# Altium PCB mppt.PcbDoc (part 3 of 6)
Units mm, origin at the board's own origin, x right, y up, seen from the top; angles counter-clockwise.
Board outline 161 x 166 mm, 6 copper layers (Top Layer, Layer 1, Layer 2, Layer 3, Layer 4, Bottom Layer), stack 0.815 mm thick; 460 components, 230 nets, 1421 pads, 2551 vias.
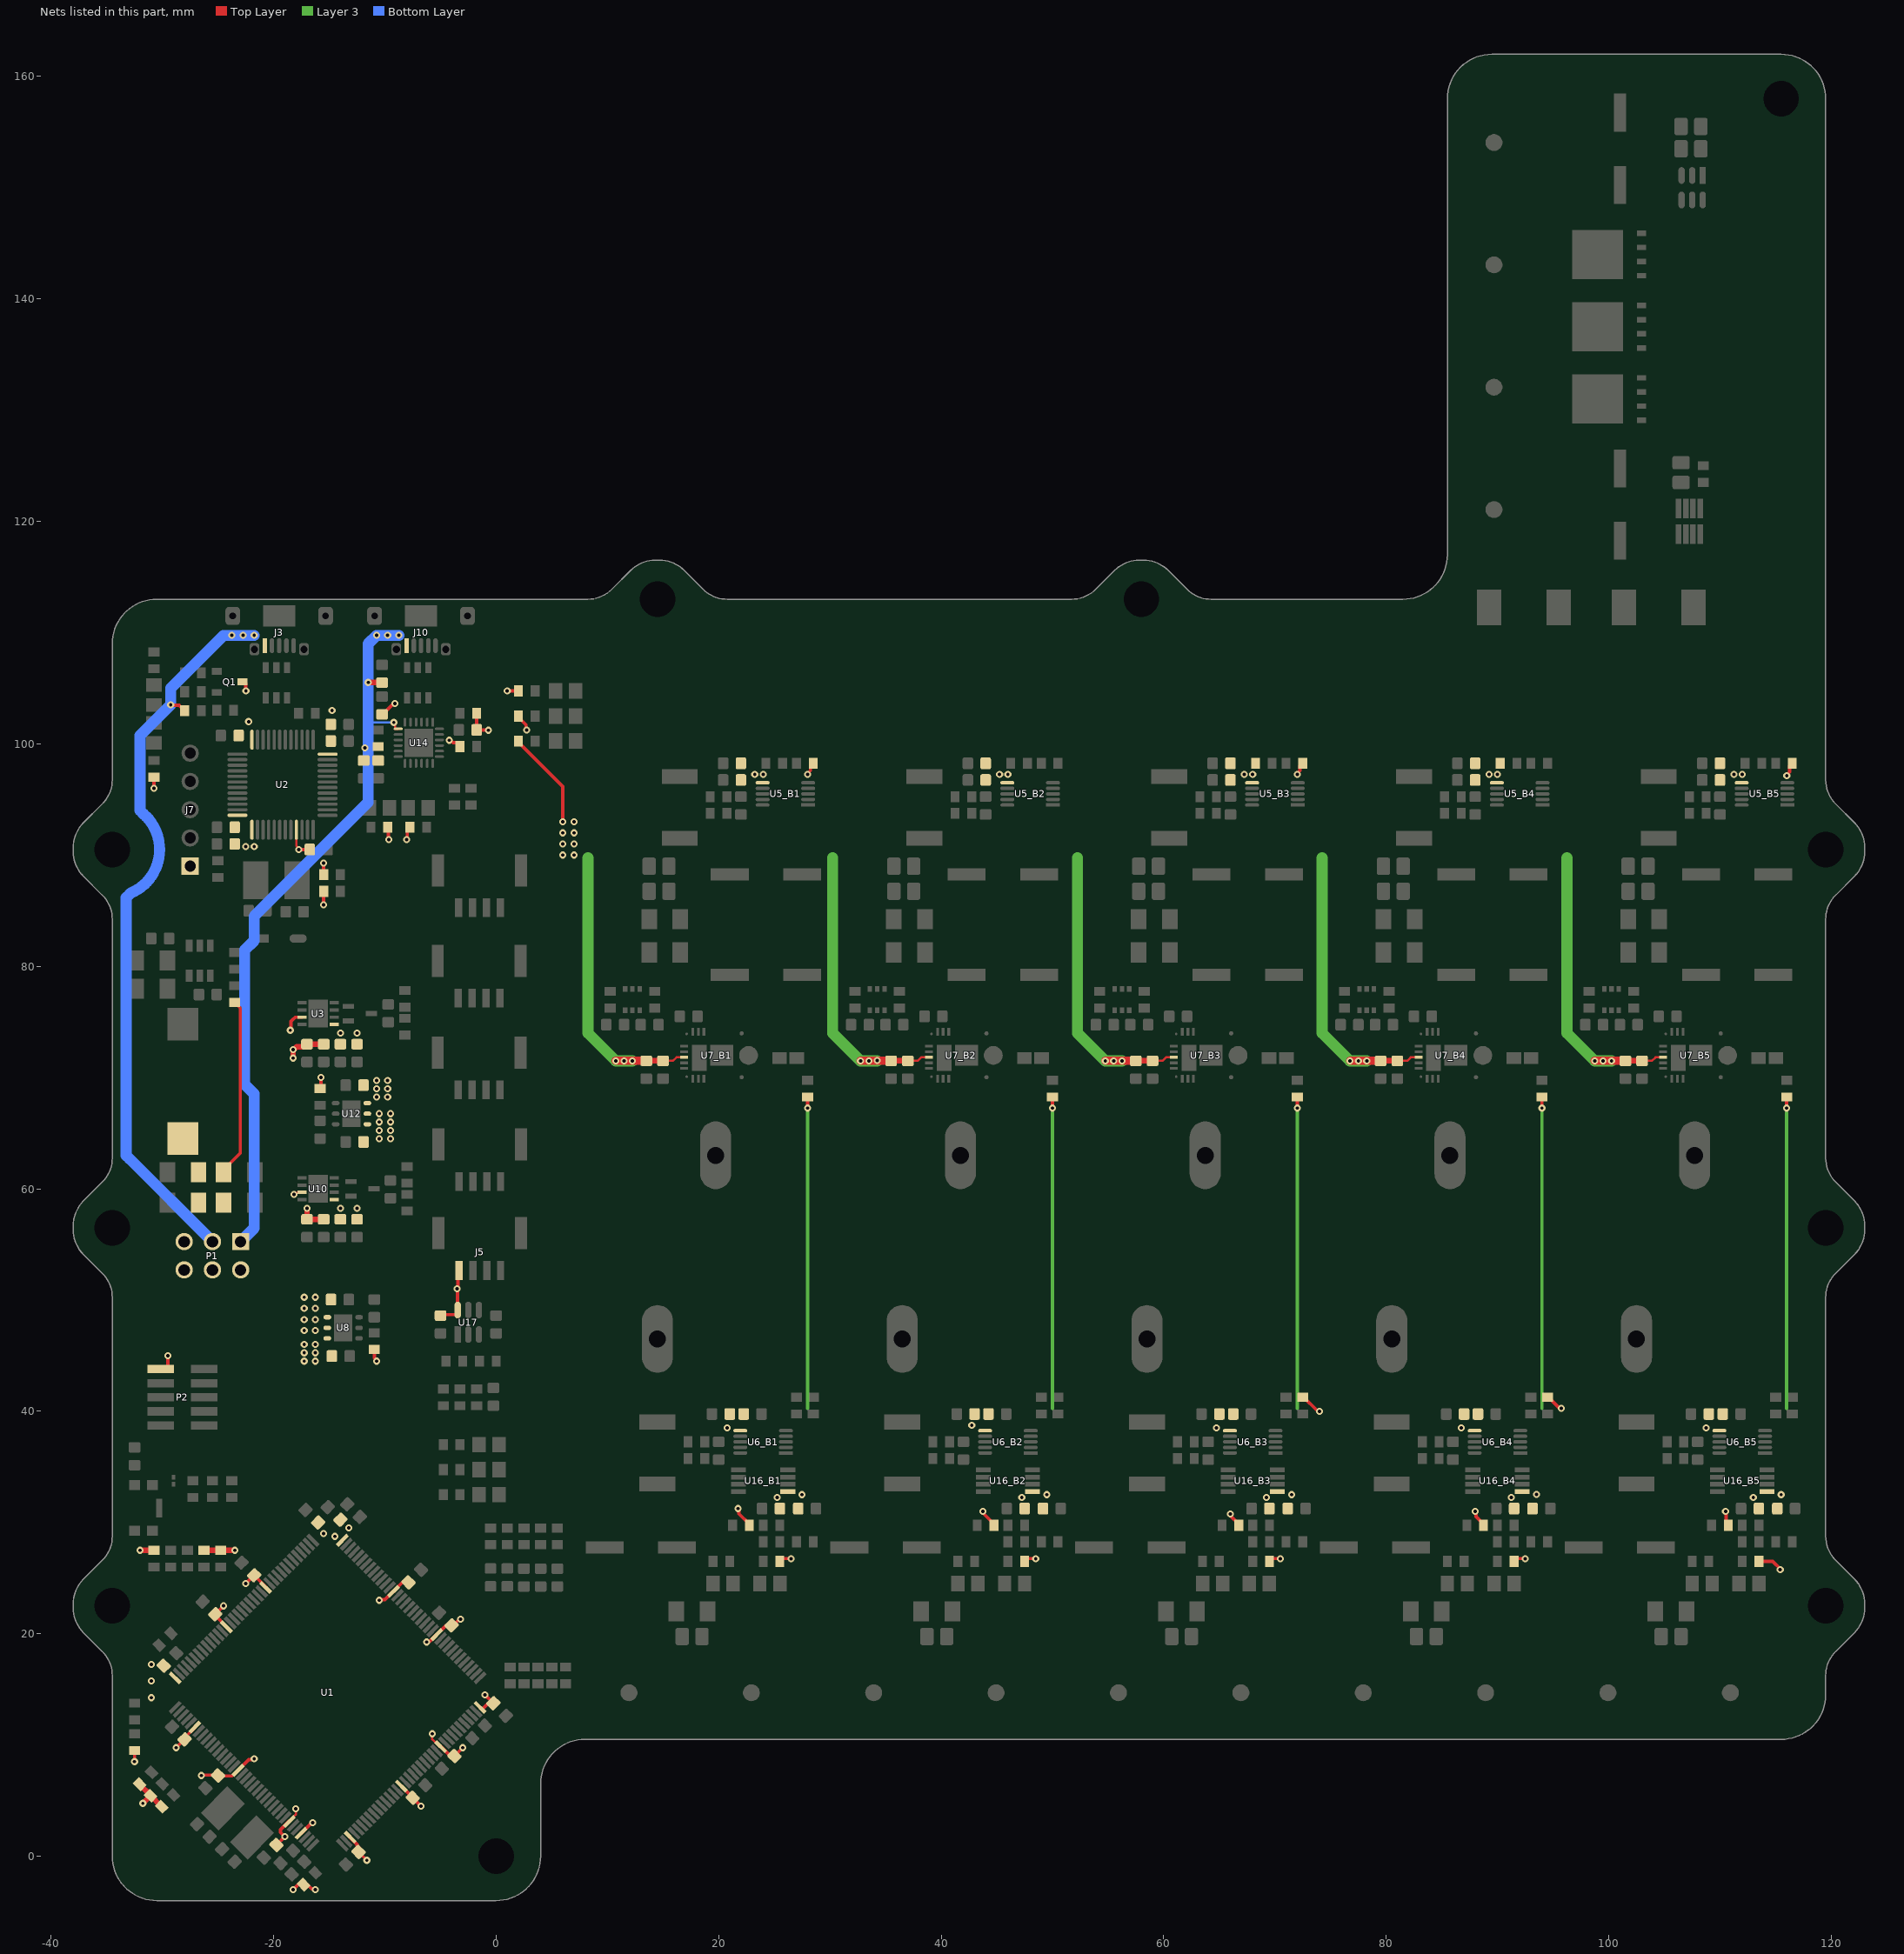
[diagram p6: the nets of this part, all layers, seen from the top]

## Part data (continued)
U5_B1 U5_B2 U5_B3 U5_B4 U5_B5 U6_B1 U6_B2 U6_B3 U6_B4 U6_B5: library part CMP-015-000056-2, "General Purpose Amplifiers; INA228AIDGSR; TEXAS INSTRUMENTS; 10; 3 mm; 3 mm; 5.5 V", Ambient Temperature Range High=125°C, Case/Package=VSSOP, Input Bias Current=10nA, Input Offset Voltage (Vos)=1mV, Manufacturer Lifecycle Status=ACTIVE, Max Junction Temperature (Tj)=150°C, Max Supply Voltage=5.5V, Min Operating Temperature=-40°C, Min Supply Voltage=2.7V, Nominal Supply Current=640µA, Output Current=10mA, Height=1.07mm, Length=3mm, Lifecycle Status=Production, Max Operating Temperature=125°C, Number of Channels=1, Pins=10, RoHS=Compliant, Thickness=1.02mm, Width=3mm
U7_B1 U7_B2 U7_B3 U7_B4 U7_B5: library part CMP-240-000000-3, "100V 2.6mâ„", Manufacturer_Name="Texas Instruments", Copyright="Copyright (C) 2025 Ultra Librarian. All rights reserved.", Design Item ID=LMG2100R026VBNR, Manufacturer_Part_Number=LMG2100R026VBNR, RefDes=RefDes, Source=LMG2100R026VBNR.SchLib, Type=TYPE
U8 U12: library part CMP-015-000054-1, "ST1L05 Series 1.3 A 3.3 V Fixed Output LDO BICMOS Voltage Regulator - DFN-6", Case/Package=DFN, Dropout Voltage=300mV, Max Junction Temperature (Tj)=125°C, Max Output current=1.3A, Max Supply Voltage=5.5V, Min Input Voltage=3V, Min Operating Temperature=0°C, Min Output Voltage=3.3V, Output Voltage Accuracy=2%, Quiescent Current=500µA, Voltage Tolerance=2.5%, Accuracy=2%, China RoHS=Compliant, Country of Origin=Malaysia, Export Control Classification Number (ECCN) Code=EAR99, Harmonized Tariff Schedule (HTS) Code=8542.39.00.60, Height - Seated (Max)=1mm, Introduction Date=2008-02-29, Lead Free="Lead Free", Length=3mm, Lifecycle Status=Production, Max Operating Temperature=125°C, Min Current Limit=1.3A, Mounting Technology="Surface Mount", Number of Channels=1, Number of Circuits=1, Number Of Outputs=1, Number of Regulators=1, Number of Terminals=6, Output Current=1.3A, Output Type=Fixed, Output Voltage=3.3V, Packaging="Cut Tape (CT)", Pins=6, Polarity=Positive, Radiation Hardening=No, REACH SVHC=Yes, RoHS=Compliant, Schedule B="8542390000, 8542390000", Terminal Pitch=950µm, Width=3mm
U9: library part CMP-015-000057-1, "3.2-V to 65-V, 80-uA IQ automotive ideal diode controller 6-SOT-23 -40 to 125", Ambient Temperature Range High=125°C, Case/Package=SOT-23, Manufacturer Lifecycle Status=ACTIVE, Max Junction Temperature (Tj)=150°C, Max Supply Voltage=65V, Min Operating Temperature=-40°C, Min Supply Voltage=3.2V, Nominal Supply Current=80µA, Height=0m, Length=2.9mm, Lifecycle Status=Production, Max Operating Temperature=125°C, Number Of Outputs=1, Pins=6, RoHS=Compliant, Schedule B=8542390000, Thickness=1.2mm, Width=1.6mm
U13: library part CMP-007-000012-2, "SIMPLE SWITCHERÂ® synchronous buck converter with 4.3V-to-60V, 2.5A and low quiescent current 6-SOT-23-THIN -40 to 150", Manufacturer_Name="Texas Instruments", Copyright="Copyright (C) 2026 Ultra Librarian. All rights reserved.", Design Item ID=LMR51625XDDCR, Manufacturer_Part_Number=LMR51625XDDCR, RefDes=RefDes, Source=LMR51625XDDCR.SchLib, Type=TYPE
U14: library part CMP-071-000004-1, "IC Usb to Uart Bridge QFN24 / Usb Bridge, Usb to Uart Usb 2.0 Uart Interface 24-QFN (4X4)", Ambient Temperature Range High=85°C, Manufacturer Lifecycle Status="FULL PRODUCTION", Max Junction Temperature (Tj)=105°C, Max Supply Voltage=3.6V, Min Operating Temperature=-40°C, Min Supply Voltage=3V, Nominal Supply Voltage (DC)=3.3V, Temperature Grade=Industrial, China RoHS=Compliant, Data Rate=1.5Mbps, Harmonized Tariff Schedule (HTS) Code=8542.31.00.30, Height=800µm, Height - Seated (Max)=800µm, Interface=UART, Introduction Date=2019-03-12, Length=4mm, Lifecycle Status=Production, Max Operating Temperature=85°C, Number of Digital IO=4, Number of Terminals=24, REACH SVHC=Yes, RoHS=Compliant, Schedule B="8542390000, 8542390000", Terminal Pitch=500µm, Width=4mm
U15: library part CMP-050-000033-2, "3.2-V to 65-V industrial RPP controller with load disconnect and OVP 8-SOT-23-THIN -40 to 125", Manufacturer_Name="Texas Instruments", Copyright="Copyright (C) 2026 Ultra Librarian. All rights reserved.", Design Item ID=LM74502DDFR, Manufacturer_Part_Number=LM74502DDFR, RefDes=RefDes, Source=LM74502DDFR.SchLib, Type=TYPE
U16_B1 U16_B2 U16_B3 U16_B4 U16_B5: library part CMP-365-000000-2, "-4-V to 110-V, 1.3-MHz, ultra-precise current-sense amplifier with comparator 8-VSSOP -40 to 125", Manufacturer_Name="Texas Instruments", Copyright="Copyright (C) 2025 Ultra Librarian. All rights reserved.", Design Item ID=INA310A2IDGKR, Manufacturer_Part_Number=INA310A2IDGKR, RefDes=RefDes, Source=INA310A2IDGKR.SchLib, Type=Linear
U17: library part CMP-365-000001-1, "Low-power comparator with reference (push-pull) 6-SOT-23 -40 to 125", Case/Package=SOT-23, Input Bias Current=1pA, Input Offset Voltage (Vos)=500µV, Manufacturer Lifecycle Status=ACTIVE, Max Input Current=10pA, Max Junction Temperature (Tj)=150°C, Max Operating Temperature=85°C, Max Supply Current=5µA, Max Supply Voltage=5.5V, Min Operating Temperature=-40°C, Min Supply Voltage=1.8V, Nominal Supply Current=2.8µA, Output Current=500µA, Power Supply Rejection Ratio (PSRR)=80dB, Common Mode Rejection Ratio=74dB, Contact Plating=Gold, Height=0m, Lead Free="Lead Free", Length=2.9mm, Lifecycle Status=Production, Mounting Technology="Surface Mount", Number of Channels=1, Number of Elements=1, Pins=6, Propagation Delay=13.5µs, Quiescent Current=5µA, Radiation Hardening=No, REACH SVHC=No, Response Time=6µs, RoHS=Compliant, Schedule B="8542390000, 8542390000", Thickness=1.2mm, Width=1.6mm
Y1 Y2: library part CMP-002-000019-2, "8MHz 20pF ±10ppm SMD5032-2P Crystals ROHS JLCPCB PICK&PLACE", Frequency=8MHz, JLCPCB Part #=C115962, Manufacturer="Yangxing Tech", MFR.Part #=X50328MSB2GI

## Via types
v1: diameter 0.635, hole 0.305, Top Layer to Bottom Layer, tented both sides, 2197 vias
v2: diameter 0.559, hole 0.203, Top Layer to Bottom Layer, tented both sides, 350 vias
v3: diameter 0.5, hole 0.2, Top Layer to Bottom Layer, 4 vias

## Nets (pads, with @x,y where several pads share a name; then routed paths per layer and width w, separated by ;. In a path a pad name is that pad's centre, name@x,y a point inside that pad or via, vN(x,y) a via of type N, cw(c..) or ccw(c..) an arc to the next point about the centre after c; other vN are vias at no path point)
3V3: C3.2 C4.2 C5.2 C6.2 C7.2 C8.2 C9.2 C10.2 C11.2 C12.2 C13.2 C14.2 C15.2 C16.2 C22.2 C41.2 C42.2 C43.2 C44.2 C45.2 C46.2 C48.2 C53.2 C57.2 C58.2 C80.2 C81.2 C94.2 J5.1 J7.1 P2.1 Q1.3 R1.1 R35.2 R38.2 R43.1 R48.2 R49.2 R58.1 R62.1 R63.2 R64.2 R66.1 R69.1 R80.2 R81.2 R95.2 R96.2 U1.6 U1.17 U1.30 U1.33 U1.39 U1.52 U1.62 U1.72 U1.84 U1.95 U1.108 U1.121 U1.131 U1.144 U2.1 U2.9 U2.24 U2.36 U2.48 U3.5 U8.4 U8.5 U10.5 U17.6 | length 72.4
  Top Layer w0.203: U1.30@-18.5,3.25 -18.489,3.25 -18,3.739 v1(-18,4.25) ; U2.9@-17.95,92.275 -17.95,90.817 -17.75,90.617 v1(-17.75,90.5) ; v1(-5.75,11) -5.75,10.496 -5.093,9.839 U1.62@-4.985,9.839
  Top Layer w0.3: v1(-32.5,8.5) R66.1@-32.5,9.5 ; v1(-30.75,96) R43.1@-30.75,97 ; P2.1@-30.15,43.79 -29.73,43.79 -29.5,44.02 v1(-29.5,45) ; C5.2@-29.881,17.119 C5.2@-29.881,17.125 ; v1(-28.75,9.75) C4.2@-28,10.5 -28,10.65 -27.082,11.567 U1.6@-27.082,11.606 ; v1(-26.5,7.25) -26.463,7.287 -25.037,7.287 C3.2@-25,7.25 -24.963,7.213 -23.737,7.213 -23.233,7.717 U1.17@-23.193,7.717 -22.225,8.686 -21.814,8.686 v1(-21.75,8.75) ; v1(-24.5,22.5) C6.2@-25.25,21.75 -25.25,21.657 -24.254,20.661 U1.131@-24.254,20.622 ; Q1.3@-22.8,105.575 -22.65,105.575 -22.5,105.425 -22.5,104.775 v1(-22.487,104.763) ; v1(-22.5,24.5) C7.2@-21.75,25.25 -21.108,24.608 -21.108,24.586 -20.718,24.197 U1.121@-20.718,24.158 ; C9.2@-19.75,1 v1(-19,1.75) -19.376,2.126 -19.376,2.374 -18.629,3.121 U1.30@-18.597,3.121 ; v1(-18.25,-3) -18.245,-3 -17.735,-2.49 -17.381,-2.49 R1.1@-17.311,-2.561 -16.957,-2.561 -16.582,-2.936 -16.314,-2.936 v1(-16.25,-3) ; v1(-17.75,90.5) C45.2@-16.75,90.5 ; U1.33@-17.536,2.06 -17.497,2.06 -16.558,3 v1(-16.5,3) ; v1(-15.5,85.525) R38.2@-15.5,86.75 ; R35.2@-15.5,88.25 v1(-15.5,89.275) ; U1.39@-13.117,1.707 -13.117,1.668 -12.5,1.051 -12.5,0.969 -12.25,0.719 C14.2@-12.25,0.5 ; C14.2@-12.369,0.381 v1(-11.619,-0.369) ; v1(-10.5,23) -10.436,23.064 -10.007,23.064 -9.267,23.804 U1.95@-9.228,23.804 -8.413,24.619 -8.412,24.619 -8.375,24.656 -7.918,24.656 C12.2@-7.881,24.619 ; C81.2@-10.25,102.65 -10.198,102.65 -9.287,103.561 -9.164,103.561 v1(-9.1,103.625) ; R64.2@-9.75,92.5 -9.7,92.45 -9.7,91.45 v1(-9.65,91.4) ; U1.52@-8.521,6.303 -8.521,6.287 -7.5,5.266 C15.2@-7.5,5.25 v1(-6.75,4.5) ; v1(-8.05,91.4) -7.986,91.464 -7.986,92.264 R63.2@-7.75,92.5 ; v1(-6.25,19.25) -6.186,19.314 -5.979,19.314 -5.378,19.915 U1.84@-5.339,19.915 -4.541,20.713 -4.037,20.713 C16.2@-4,20.75 -3.841,20.75 -3.291,21.3 v1(-3.2,21.3) ; C94.2@-5,48.5 -4.809,48.691 -3.575,48.691 -3.45,48.816 U17.6@-3.45,49.1 ; U1.62@-4.985,9.839 -4.946,9.839 -4.107,9 C8.2@-3.75,9 v1(-3,9.75) ; v1(-4.2,100.325) -4.109,100.325 -3.884,100.1 -3.5,100.1 -3.25,99.85 R62.1@-3.25,99.75 ; U17.6@-3.475,49.1 -3.475,50.975 v1(-3.5,51) -3.436,51.064 -3.436,52.564 J5.1@-3.25,52.75 ; R58.1@-1.725,102.725 R58.1@-1.75,102.75 -1.75,101.25 -1.737,101.237 -0.713,101.237 v1(-0.7,101.225) ; U1.72@-1.45,13.374 -1.278,13.202 -1.238,13.202 -0.727,13.713 -0.287,13.713 -0.287,13.787 v1(-1,14.5) ; v1(1,104.75) R69.1@2,104.75
  Top Layer w0.5: R81.2@-32.03,6.47 -32.03,6.439 -31.061,5.47 R80.2@-31.061,5.439 ; v1(-32,27.5) R95.2@-30.75,27.5 ; v1(-31.75,4.75) R80.2@-31.061,5.439 ; R96.2@-30.061,4.439 R80.2@-31.061,5.439 ; R49.2@-26.25,27.5 R48.2@-24.75,27.5 v1@-23.5,27.5
  other v1: -31,14.25 -31,15.75 -31,17.25 -23.5,27.5 -14.5,28.75 -15.5,29 -13.25,29.5 -17.25,47.25 -16.25,47.25 -17.25,48.25 -16.25,48.25 -17.25,49.25 -16.25,49.25 -17.25,50.25 -16.25,50.25 -14,58.25 -12.5,58.25 -14,74 -12.5,74 -22.5,90.775 -21.75,90.775 -22.25,102 -14.75,103
3V3_INA: C23_B1.2 C23_B2.2 C23_B3.2 C23_B4.2 C23_B5.2 C24_B1.2 C24_B2.2 C24_B3.2 C24_B4.2 C24_B5.2 C50_B1.2 C50_B2.2 C50_B3.2 C50_B4.2 C50_B5.2 C52_B1.2 C52_B2.2 C52_B3.2 C52_B4.2 C52_B5.2 C60.2 C87_B1.2 C87_B2.2 C87_B3.2 C87_B4.2 C87_B5.2 C88_B1.2 C88_B2.2 C88_B3.2 C88_B4.2 C88_B5.2 R9_B1.2 R9_B2.2 R9_B3.2 R9_B4.2 R9_B5.2 R11_B1.2 R11_B3.2 R11_B5.2 R13_B3.2 R13_B4.2 R16_B1.2 R16_B2.2 R16_B3.2 R16_B4.2 R16_B5.2 R45_B1.1 R45_B2.1 R45_B3.1 R45_B4.1 R45_B5.1 R68.1 R86_B3.1 R86_B4.1 U5_B1.6 U5_B2.6 U5_B3.6 U5_B4.6 U5_B5.6 U6_B1.6 U6_B2.6 U6_B3.6 U6_B4.6 U6_B5.6 U12.4 U12.5 U16_B1.1 U16_B2.1 U16_B3.1 U16_B4.1 U16_B5.1 | length 163.5
  Top Layer w0.3: R68.1@2,102.5 2,102.4 2.686,101.714 2.686,101.314 v1(2.75,101.25) ; v1(21.75,31.25) 21.814,31.186 21.814,30.786 22.75,29.85 R16_B1.2@22.75,29.75 ; R45_B1.1@25.5,26.5 25.75,26.75 v1(26.5,26.75) ; v1(28,67.25) R9_B1.2@28,68.25 ; v1(28,97.25) 28,97.341 28.25,97.591 28.25,98 R11_B1.2@28.5,98.25 ; v1(43.75,31) 43.814,30.936 43.814,30.786 44.75,29.85 R16_B2.2@44.75,29.75 ; R45_B2.1@47.5,26.5 47.75,26.75 v1(48.5,26.75) ; v1(50,67.25) R9_B2.2@50,68.25 ; v1(66,30.75) 66.064,30.686 66.064,30.536 66.75,29.85 R16_B3.2@66.75,29.75 ; R45_B3.1@69.5,26.5 69.75,26.75 v1(70.5,26.75) ; v1(72,67.25) R9_B3.2@72,68.25 ; v1(72,97.25) 72,97.341 72.25,97.591 72.25,98 R11_B3.2@72.5,98.25 ; R86_B3.1@72.5,41.25 72.6,41.25 73.786,40.064 73.936,40.064 v1(74,40) ; v1(88,31) 88.064,30.936 88.064,30.536 88.75,29.85 R16_B4.2@88.75,29.75 ; R45_B4.1@91.5,26.5 91.75,26.75 v1(92.5,26.75) ; v1(94,67.25) R9_B4.2@94,68.25 ; R86_B4.1@94.5,41.25 94.6,41.25 95.536,40.314 95.686,40.314 v1(95.75,40.25) ; v1(110.5,31) 110.564,30.936 110.564,29.936 R16_B5.2@110.75,29.75 ; R45_B5.1@113.5,26.5 114.75,26.5 v1@115.5,25.75 ; v1(116,67.25) R9_B5.2@116,68.25 ; v1(116.004,97.13) 116.004,97.221 116.25,97.467 116.25,98 R11_B5.2@116.5,98.25
  Layer 3 w0.3: 28,40.25 v1(28,67.25) ; 50,40.25 v1(50,67.25) ; 72,40.25 v1(72,67.25) ; 94,40.25 v1(94,67.25) ; 116,40.25 v1(116,67.25)
  other v1: 115.417,25.76 25.25,32.25 47.25,32.25 69.25,32.25 91.25,32.25 113,32.25 27.5,32.5 49.5,32.5 71.5,32.5 93.5,32.512 115.5,32.5 20.75,38.5 64.75,38.5 86.75,38.5 108.75,38.5 42.75,38.75 -10.5,64.5 -9.5,64.5 -10.5,65.25 -9.5,65.25 -10.5,66 -9.5,66 -10.5,66.75 -9.5,66.75 23.25,97.25 24,97.25 45.25,97.25 46,97.25 67.25,97.25 68,97.25 89.25,97.25 90,97.25 111.25,97.25 112,97.25
5V: C20.2 C21.2 C25_B1.2 C25_B2.2 C25_B3.2 C25_B4.2 C25_B5.2 C47.2 C51_B1.2 C51_B2.2 C51_B3.2 C51_B4.2 C51_B5.2 C55.2 C56.2 C59.2 P1.2 P1.4 P1.6 R47.1 R52.1 R70.1 U3.3 U7_B1.14 U7_B2.14 U7_B3.14 U7_B4.14 U7_B5.14 U8.6 U10.3 U12.6 | length 155.6
  Top Layer w0.203: v1(-18.156,59.504) -18.039,59.504 -17.919,59.624 U10.3@-17.249,59.624 ; C25_B1.2@15,71.5 15.885,71.5 16.21,71.825 U7_B1.14@16.9,71.825 ; C25_B2.2@37,71.5 37.885,71.5 38.21,71.825 U7_B2.14@38.9,71.825 ; C25_B3.2@59,71.5 59.885,71.5 60.21,71.825 U7_B3.14@60.9,71.825 ; C25_B4.2@81,71.5 81.885,71.5 82.21,71.825 U7_B4.14@82.9,71.825 ; C25_B5.2@103,71.5 103.885,71.5 104.21,71.825 U7_B5.14@104.9,71.825
  Top Layer w0.3: v1(-18.5,74.25) -18.436,74.314 -18.436,75.064 -18.25,75.25 -18.239,75.25 -18.064,75.425 U3.3@-17.448,75.425 ; R52.1@-15.824,69.01 -15.75,69.084 v1(-15.75,70) ; R47.1@-10.95,45.55 -10.95,44.791 -10.75,44.591 v1(-10.75,44.5) ; R70.1@2,100.25 2,100.15 6,96.15 v1(6,93)
  Top Layer w0.5: v1(-18.25,71.75) v1(-18.25,72.5) -18.213,72.5 -17.936,72.777 -17.223,72.777 C21.2@-17,73 C20.2@-15.5,73 ; v1(-17,58.25) C55.2@-17,57.25 C56.2@-15.5,57.25 ; C51_B1.2@13.5,71.5 C25_B1.2@15,71.5 ; C51_B2.2@35.5,71.5 C25_B2.2@37,71.5 ; C51_B3.2@57.5,71.5 C25_B3.2@59,71.5 ; C51_B4.2@79.5,71.5 C25_B4.2@81,71.5 ; C51_B5.2@101.5,71.5 C25_B5.2@103,71.5
  Top Layer w0.75: v1(10.75,71.5) C51_B1.2@13.5,71.5 ; v1(32.75,71.5) C51_B2.2@35.5,71.5 ; v1(54.75,71.5) C51_B3.2@57.5,71.5 ; v1(76.75,71.5) C51_B4.2@79.5,71.5 ; v1(98.75,71.5) C51_B5.2@101.5,71.5
  Layer 3 w1: 8.25,89.75 8.25,74 v1(10.75,71.5) v1(11.5,71.5) v1(12.25,71.5) ; 30.25,89.75 30.25,74 v1(32.75,71.5) v1(33.5,71.5) v1@34.25,71.5 ; 52.25,89.75 52.25,74 v1(54.75,71.5) v1(55.5,71.5) v1(56.25,71.5) ; 74.25,89.75 74.25,74 v1(76.75,71.5) v1(77.5,71.5) v1(78.25,71.5) ; 96.25,89.75 96.25,74 v1(98.75,71.5) v1(99.5,71.5) v1(100.25,71.5)
  other v1: -17.25,44.5 -16.25,44.5 -17.25,45.25 -16.25,45.25 -17.25,46 -16.25,46 -10.75,68.25 -9.75,68.25 -10.75,69 -9.75,69 -10.75,69.75 -9.75,69.75 34.25,71.521 6,90 7,90 6,91 7,91 6,92 7,92 7,93
5V_REG: C72.1 C73.1 C74.1 C75.1 L2.2 P1.5 R8.2 | length 16.1
  Top Layer w0.3: C73.1@-24.5,61.5 -24.5,61.701 -23,63.201 -23,76.25 -23.15,76.4 -23.15,76.5 -23.4,76.75 R8.2@-23.5,76.75
5V_STLINK: J3.1 P1.3 R39.1 | length 66.9
  Top Layer w0.3: v1(-29.25,103.5) -29.208,103.458 -28.483,103.458 -28.35,103.325 -28.25,103.325 -28,103.075 R39.1@-28,102.975
  Bottom Layer w1: P1.3@-25.5,55.25 -32.957,62.707 -33.25,63 -33.25,86.169 -32.957,86.462 -32.828,86.591 ccw(c-34.5,90.5) -30.248,90.5 ccw(c-34.5,90.5) -31.686,93.687 -31.707,93.708 -32,94.001 -32,100.75 v1(-29.25,103.5) -29.25,105 -24.5,109.75 v1(-23.75,109.75) v1(-22.75,109.75) v1(-21.75,109.75)
5V_USB: C79.2 C82.2 C83.2 J10.1 P1.1 R61.2 U14.7 | length 66.7
  Top Layer w0.203: v1(-9.2,101.925) -9.2,101.808 -9.093,101.701 -9.093,101.367 -9.077,101.35 U14.7@-8.801,101.35
  Top Layer w0.5: v1(-11.5,105.525) -11.488,105.512 -10.262,105.512 C79.2@-10.25,105.5
  Bottom Layer w0.203: -11.5,101.9 -11.475,101.925 v1(-9.2,101.925)
  Bottom Layer w1: P1.1@-22.96,55.25 -21.75,56.46 -21.75,68.532 -22.602,69.384 -22.602,81.456 -21.75,82.308 -21.75,84.5 -11.5,94.75 -11.5,99.625 -11.5,101.9 v1(-11.5,105.525) -11.5,109 v1(-10.75,109.75) v1(-9.75,109.75) v1(-8.75,109.75)
  other v1: -11.8,99.625